# EAGLE board Adapter-IOX-test_array (EAGLE 7.7.0), part 1 of 2
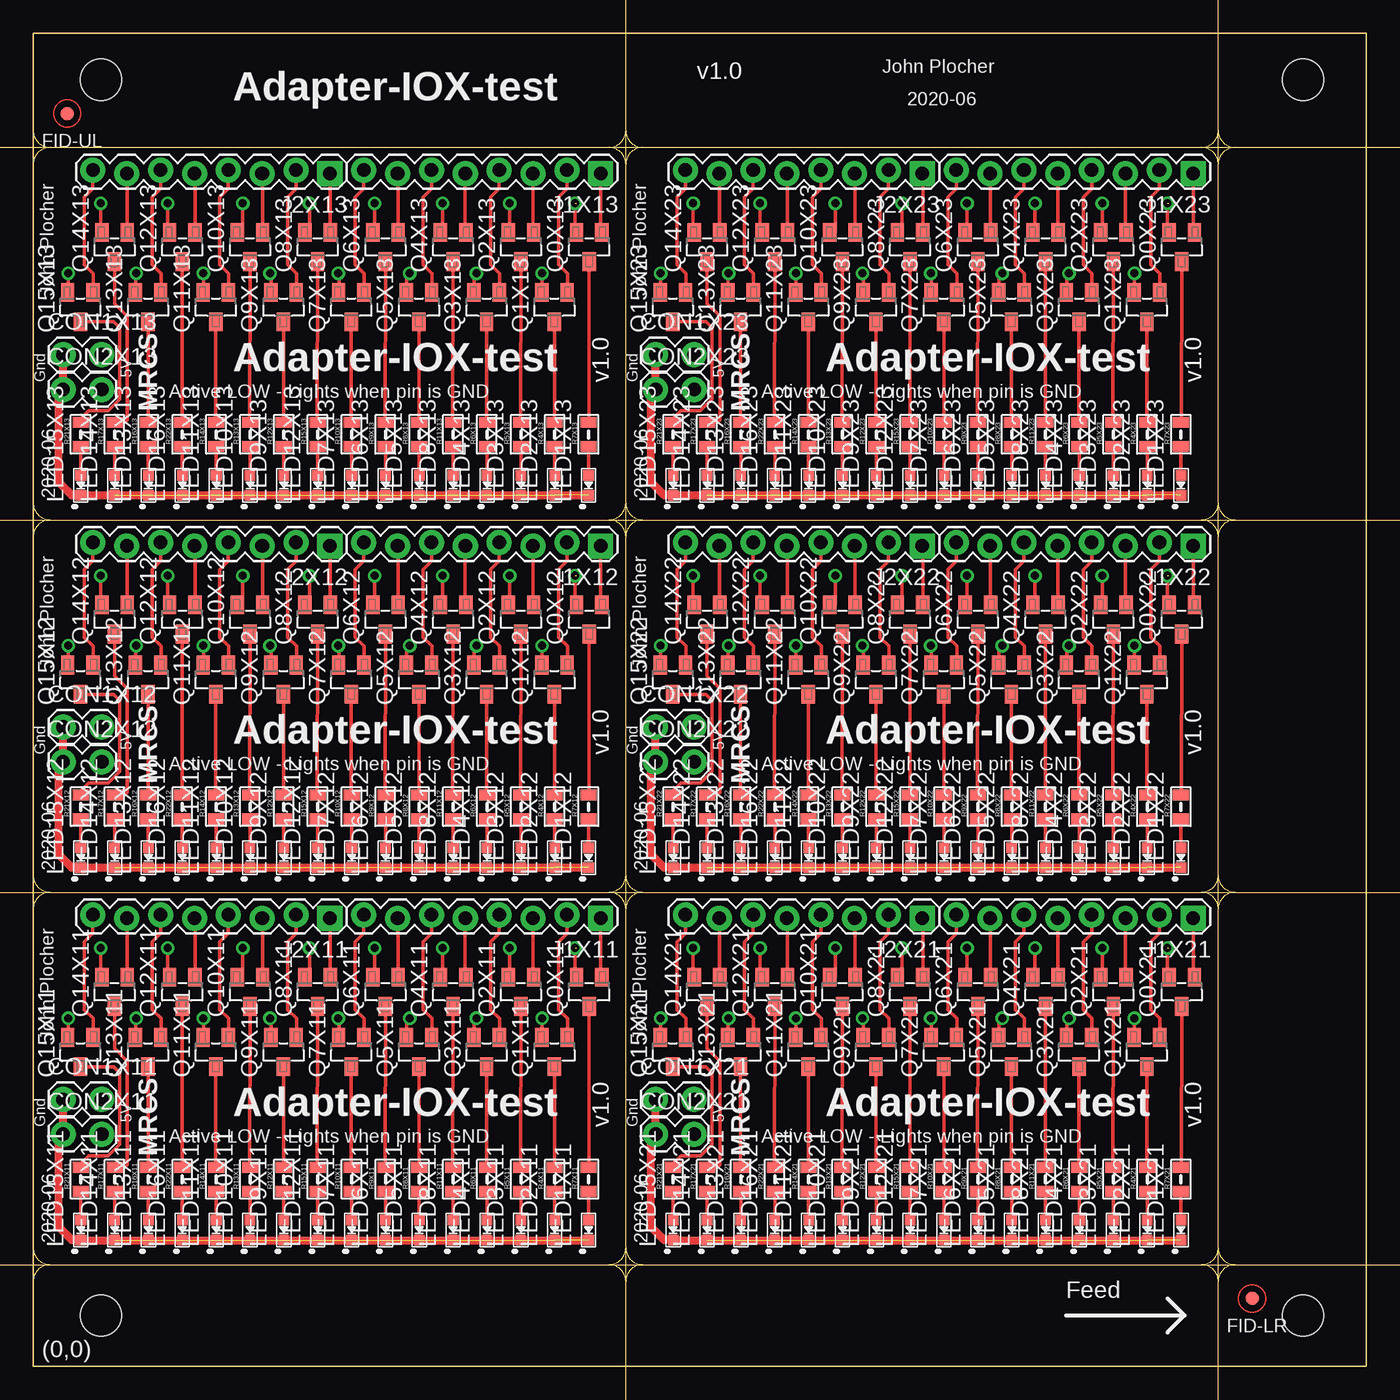
[diagram p0: board, top side]
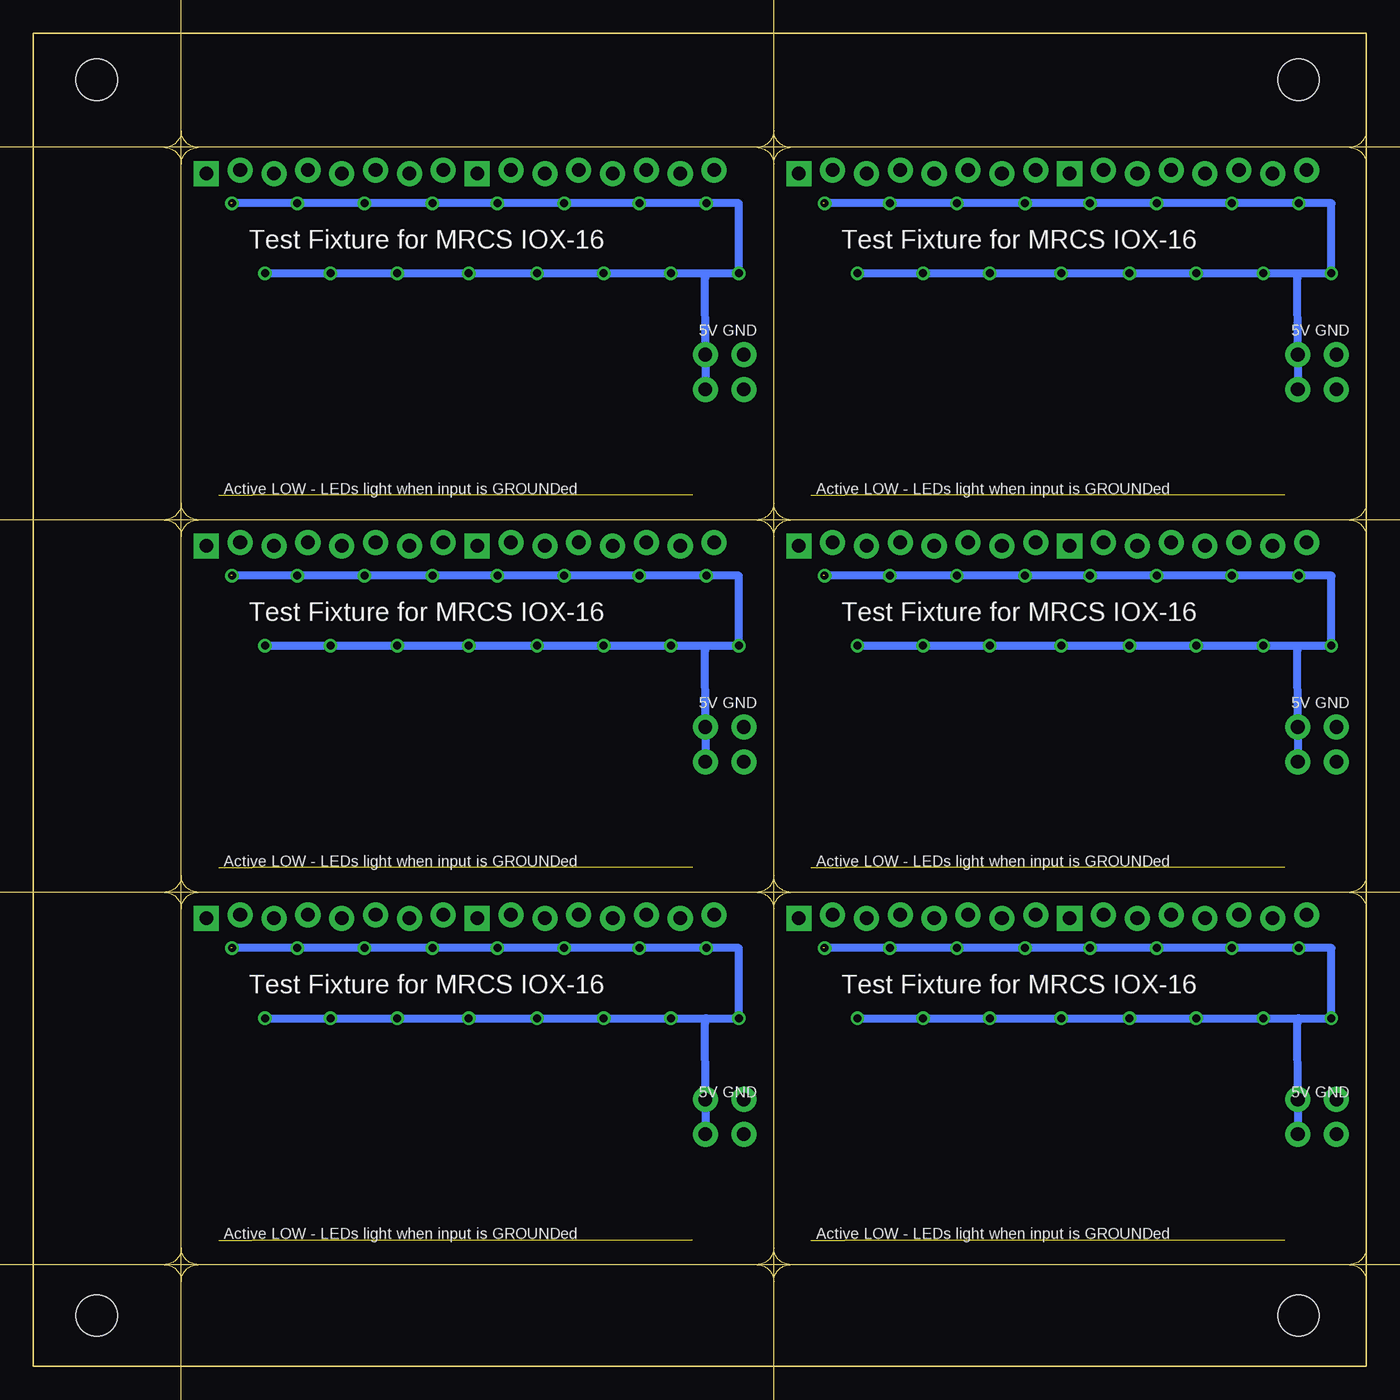
[diagram p1: board, bottom side, seen from below]

Size 100 x 100 mm. Coordinates in mm from the lower left corner, seen from the top.
Outline: 0,34.29 arc-90 1.27,35.56 arc-90 0,36.83
Outline: 0,8.89 arc90 1.27,7.62 arc90 0,6.35
Outline: 0,62.23 arc-90 1.27,63.5 arc-90 0,64.77
Outline: 0,90.17 arc-90 1.27,91.44 arc-90 0,92.71
Outline: 44.45,34.29 arc90 43.18,35.56 arc90 44.45,36.83 arc90 45.72,35.56 arc90 44.45,34.29
Outline: 43.18,7.62 arc90 44.45,8.89 arc90 45.72,7.62 arc90 44.45,6.35 arc90 43.18,7.62
Outline: 44.45,62.23 arc90 43.18,63.5 arc90 44.45,64.77 arc90 45.72,63.5 arc90 44.45,62.23
Outline: 44.45,90.17 arc90 43.18,91.44 arc90 44.45,92.71 arc90 45.72,91.44 arc90 44.45,90.17
Outline: 88.9,34.29 arc90 87.63,35.56 arc90 88.9,36.83 arc90 90.17,35.56 arc90 88.9,34.29
Outline: 87.63,7.62 arc90 88.9,8.89 arc90 90.17,7.62 arc90 88.9,6.35 arc90 87.63,7.62
Outline: 88.9,62.23 arc90 87.63,63.5 arc90 88.9,64.77 arc90 90.17,63.5 arc90 88.9,62.23
Outline: 88.9,90.17 arc90 87.63,91.44 arc90 88.9,92.71 arc90 90.17,91.44 arc90 88.9,90.17
Copper layers (1*16): Top 0.035mm / dielectric 1.5mm / Bottom 0.035mm
Design rules "default": minimum track width 10mil, minimum drill 0.6mm, track to track 8mil, track to pad 8mil, pad to pad 8mil, via to via 8mil, smd to smd 8mil, copper to edge 40mil, drill to drill 8mil, minimum pad ring 10mil, minimum via ring 8mil, stop-mask expansion 4mil, vias tented up to drill 0mil, thermal gap 10mil
Milling: 6 lines

## Footprints (pad centres in the part's own frame; a part is rotated, then mirrored left to right if it is on the bottom)
1X02_LOCK = drill 1.016 pad 1.88: 1 -0.178,0; 2 2.718,0
FIDUCIAL_1MM = smd 1 x 1: 1 0,0
1X08_LOCK = drill 1.016 pad 1.88 square: 1 0,0.127 | drill 1.016 pad 1.88: 2 2.54,-0.127; 3 5.08,0.127; 4 7.62,-0.127; 5 10.16,0.127; 6 12.7,-0.127; 7 15.24,0.127; 8 17.78,-0.127
0603-LED = smd 0.8 x 0.8: A 0.75,0; C -0.75,0
SOT23 = smd 1.4 x 1: 1 1.1,-0.95; 2 1.1,0.95; 3 -1.1,0
0805-RES = smd 0.8 x 1.2: 1 -0.9,0; 2 0.9,0
BOARD-10X10-TEMPLATE = hole 3.1: 5.08,96.52; 95.25,96.52; 5.08,3.81; 95.25,3.81

## Placement (x,y rotation side)
CON1X11  0.100  [1X02_LOCK]  2.41,20.02 0 top
CON1X12  0.100  [1X02_LOCK]  2.41,47.96 0 top
CON1X13  0.100  [1X02_LOCK]  2.41,75.9 0 top
CON1X21  0.100  [1X02_LOCK]  46.86,20.02 0 top
CON1X22  0.100  [1X02_LOCK]  46.86,47.96 0 top
CON1X23  0.100  [1X02_LOCK]  46.86,75.9 0 top
CON2X11  0.100  [1X02_LOCK]  2.41,17.4 0 top
CON2X12  0.100  [1X02_LOCK]  2.41,45.34 0 top
CON2X13  0.100  [1X02_LOCK]  2.41,73.28 0 top
CON2X21  0.100  [1X02_LOCK]  46.86,17.4 0 top
CON2X22  0.100  [1X02_LOCK]  46.86,45.34 0 top
CON2X23  0.100  [1X02_LOCK]  46.86,73.28 0 top
FID-LR  FIDUCIAL  [FIDUCIAL_1MM]  91.44,5.08 0 top
FID-UL  FIDUCIAL  [FIDUCIAL_1MM]  2.54,93.98 0 top
J1X11  0.100  [1X08_LOCK]  42.57,33.73 180 top
J1X12  0.100  [1X08_LOCK]  42.57,61.67 180 top
J1X13  0.100  [1X08_LOCK]  42.57,89.61 180 top
J1X21  0.100  [1X08_LOCK]  87.02,33.73 180 top
J1X22  0.100  [1X08_LOCK]  87.02,61.67 180 top
J1X23  0.100  [1X08_LOCK]  87.02,89.61 180 top
J2X11  0.100  [1X08_LOCK]  22.25,33.73 180 top
J2X12  0.100  [1X08_LOCK]  22.25,61.67 180 top
J2X13  0.100  [1X08_LOCK]  22.25,89.61 180 top
J2X21  0.100  [1X08_LOCK]  66.7,33.73 180 top
J2X22  0.100  [1X08_LOCK]  66.7,61.67 180 top
J2X23  0.100  [1X08_LOCK]  66.7,89.61 180 top
LED1X11  Y  [0603-LED]  41.66,10.21 90 top
LED1X12  Y  [0603-LED]  41.66,38.15 90 top
LED1X13  Y  [0603-LED]  41.66,66.09 90 top
LED1X21  Y  [0603-LED]  86.11,10.21 90 top
LED1X22  Y  [0603-LED]  86.11,38.15 90 top
LED1X23  Y  [0603-LED]  86.11,66.09 90 top
LED2X11  Y  [0603-LED]  39.12,10.21 90 top
LED2X12  Y  [0603-LED]  39.12,38.15 90 top
LED2X13  Y  [0603-LED]  39.12,66.09 90 top
LED2X21  Y  [0603-LED]  83.57,10.21 90 top
LED2X22  Y  [0603-LED]  83.57,38.15 90 top
LED2X23  Y  [0603-LED]  83.57,66.09 90 top
LED3X11  Y  [0603-LED]  36.58,10.21 90 top
LED3X12  Y  [0603-LED]  36.58,38.15 90 top
LED3X13  Y  [0603-LED]  36.58,66.09 90 top
LED3X21  Y  [0603-LED]  81.03,10.21 90 top
LED3X22  Y  [0603-LED]  81.03,38.15 90 top
LED3X23  Y  [0603-LED]  81.03,66.09 90 top
LED4X11  Y  [0603-LED]  34.04,10.21 90 top
LED4X12  Y  [0603-LED]  34.04,38.15 90 top
LED4X13  Y  [0603-LED]  34.04,66.09 90 top
LED4X21  Y  [0603-LED]  78.49,10.21 90 top
LED4X22  Y  [0603-LED]  78.49,38.15 90 top
LED4X23  Y  [0603-LED]  78.49,66.09 90 top
LED5X11  Y  [0603-LED]  28.96,10.21 90 top
LED5X12  Y  [0603-LED]  28.96,38.15 90 top
LED5X13  Y  [0603-LED]  28.96,66.09 90 top
LED5X21  Y  [0603-LED]  73.41,10.21 90 top
LED5X22  Y  [0603-LED]  73.41,38.15 90 top
LED5X23  Y  [0603-LED]  73.41,66.09 90 top
LED6X11  Y  [0603-LED]  26.42,10.21 90 top
LED6X12  Y  [0603-LED]  26.42,38.15 90 top
LED6X13  Y  [0603-LED]  26.42,66.09 90 top
LED6X21  Y  [0603-LED]  70.87,10.21 90 top
LED6X22  Y  [0603-LED]  70.87,38.15 90 top
LED6X23  Y  [0603-LED]  70.87,66.09 90 top
LED7X11  Y  [0603-LED]  23.88,10.21 90 top
LED7X12  Y  [0603-LED]  23.88,38.15 90 top
LED7X13  Y  [0603-LED]  23.88,66.09 90 top
LED7X21  Y  [0603-LED]  68.33,10.21 90 top
LED7X22  Y  [0603-LED]  68.33,38.15 90 top
LED7X23  Y  [0603-LED]  68.33,66.09 90 top
LED8X11  Y  [0603-LED]  31.5,10.21 90 top
LED8X12  Y  [0603-LED]  31.5,38.15 90 top
LED8X13  Y  [0603-LED]  31.5,66.09 90 top
LED8X21  Y  [0603-LED]  75.95,10.21 90 top
LED8X22  Y  [0603-LED]  75.95,38.15 90 top
LED8X23  Y  [0603-LED]  75.95,66.09 90 top
LED9X11  Y  [0603-LED]  18.8,10.21 90 top
LED9X12  Y  [0603-LED]  18.8,38.15 90 top
LED9X13  Y  [0603-LED]  18.8,66.09 90 top
LED9X21  Y  [0603-LED]  63.25,10.21 90 top
LED9X22  Y  [0603-LED]  63.25,38.15 90 top
LED9X23  Y  [0603-LED]  63.25,66.09 90 top
LED10X11  Y  [0603-LED]  16.26,10.21 90 top
LED10X12  Y  [0603-LED]  16.26,38.15 90 top
LED10X13  Y  [0603-LED]  16.26,66.09 90 top
LED10X21  Y  [0603-LED]  60.71,10.21 90 top
LED10X22  Y  [0603-LED]  60.71,38.15 90 top
LED10X23  Y  [0603-LED]  60.71,66.09 90 top
LED11X11  Y  [0603-LED]  13.72,10.21 90 top
LED11X12  Y  [0603-LED]  13.72,38.15 90 top
LED11X13  Y  [0603-LED]  13.72,66.09 90 top
LED11X21  Y  [0603-LED]  58.17,10.21 90 top
LED11X22  Y  [0603-LED]  58.17,38.15 90 top
LED11X23  Y  [0603-LED]  58.17,66.09 90 top
LED12X11  Y  [0603-LED]  21.34,10.21 90 top
LED12X12  Y  [0603-LED]  21.34,38.15 90 top
LED12X13  Y  [0603-LED]  21.34,66.09 90 top
LED12X21  Y  [0603-LED]  65.79,10.21 90 top
LED12X22  Y  [0603-LED]  65.79,38.15 90 top
LED12X23  Y  [0603-LED]  65.79,66.09 90 top
LED13X11  Y  [0603-LED]  8.64,10.21 90 top
LED13X12  Y  [0603-LED]  8.64,38.15 90 top
LED13X13  Y  [0603-LED]  8.64,66.09 90 top
LED13X21  Y  [0603-LED]  53.09,10.21 90 top
LED13X22  Y  [0603-LED]  53.09,38.15 90 top
LED13X23  Y  [0603-LED]  53.09,66.09 90 top
LED14X11  Y  [0603-LED]  6.1,10.21 90 top
LED14X12  Y  [0603-LED]  6.1,38.15 90 top
LED14X13  Y  [0603-LED]  6.1,66.09 90 top
LED14X21  Y  [0603-LED]  50.55,10.21 90 top
LED14X22  Y  [0603-LED]  50.55,38.15 90 top
LED14X23  Y  [0603-LED]  50.55,66.09 90 top
LED15X11  Y  [0603-LED]  3.56,10.21 90 top
LED15X12  Y  [0603-LED]  3.56,38.15 90 top
LED15X13  Y  [0603-LED]  3.56,66.09 90 top
LED15X21  Y  [0603-LED]  48.01,10.21 90 top
LED15X22  Y  [0603-LED]  48.01,38.15 90 top
LED15X23  Y  [0603-LED]  48.01,66.09 90 top
LED16X11  Y  [0603-LED]  11.18,10.21 90 top
LED16X12  Y  [0603-LED]  11.18,38.15 90 top
LED16X13  Y  [0603-LED]  11.18,66.09 90 top
LED16X21  Y  [0603-LED]  55.63,10.21 90 top
LED16X22  Y  [0603-LED]  55.63,38.15 90 top
LED16X23  Y  [0603-LED]  55.63,66.09 90 top
Q0X11  P-FET  [SOT23]  41.71,28.09 90 top
Q0X12  P-FET  [SOT23]  41.71,56.03 90 top
Q0X13  P-FET  [SOT23]  41.71,83.97 90 top
Q0X21  P-FET  [SOT23]  86.16,28.09 90 top
Q0X22  P-FET  [SOT23]  86.16,56.03 90 top
Q0X23  P-FET  [SOT23]  86.16,83.97 90 top
Q1X11  P-FET  [SOT23]  39.09,23.57 90 top
Q1X12  P-FET  [SOT23]  39.09,51.51 90 top
Q1X13  P-FET  [SOT23]  39.09,79.45 90 top
Q1X21  P-FET  [SOT23]  83.54,23.57 90 top
Q1X22  P-FET  [SOT23]  83.54,51.51 90 top
Q1X23  P-FET  [SOT23]  83.54,79.45 90 top
Q2X11  P-FET  [SOT23]  36.58,28.09 90 top
Q2X12  P-FET  [SOT23]  36.58,56.03 90 top
Q2X13  P-FET  [SOT23]  36.58,83.97 90 top
Q2X21  P-FET  [SOT23]  81.03,28.09 90 top
Q2X22  P-FET  [SOT23]  81.03,56.03 90 top
Q2X23  P-FET  [SOT23]  81.03,83.97 90 top
Q3X11  P-FET  [SOT23]  34.01,23.57 90 top
Q3X12  P-FET  [SOT23]  34.01,51.51 90 top
Q3X13  P-FET  [SOT23]  34.01,79.45 90 top
Q3X21  P-FET  [SOT23]  78.46,23.57 90 top
Q3X22  P-FET  [SOT23]  78.46,51.51 90 top
Q3X23  P-FET  [SOT23]  78.46,79.45 90 top
Q4X11  P-FET  [SOT23]  31.5,28.09 90 top
Q4X12  P-FET  [SOT23]  31.5,56.03 90 top
Q4X13  P-FET  [SOT23]  31.5,83.97 90 top
Q4X21  P-FET  [SOT23]  75.95,28.09 90 top
Q4X22  P-FET  [SOT23]  75.95,56.03 90 top
Q4X23  P-FET  [SOT23]  75.95,83.97 90 top
Q5X11  P-FET  [SOT23]  28.93,23.57 90 top
Q5X12  P-FET  [SOT23]  28.93,51.51 90 top
Q5X13  P-FET  [SOT23]  28.93,79.45 90 top
Q5X21  P-FET  [SOT23]  73.38,23.57 90 top
Q5X22  P-FET  [SOT23]  73.38,51.51 90 top
Q5X23  P-FET  [SOT23]  73.38,79.45 90 top
Q6X11  P-FET  [SOT23]  26.42,28.09 90 top
Q6X12  P-FET  [SOT23]  26.42,56.03 90 top
Q6X13  P-FET  [SOT23]  26.42,83.97 90 top
Q6X21  P-FET  [SOT23]  70.87,28.09 90 top
Q6X22  P-FET  [SOT23]  70.87,56.03 90 top
Q6X23  P-FET  [SOT23]  70.87,83.97 90 top
Q7X11  P-FET  [SOT23]  23.85,23.57 90 top
Q7X12  P-FET  [SOT23]  23.85,51.51 90 top
Q7X13  P-FET  [SOT23]  23.85,79.45 90 top
Q7X21  P-FET  [SOT23]  68.3,23.57 90 top
Q7X22  P-FET  [SOT23]  68.3,51.51 90 top
Q7X23  P-FET  [SOT23]  68.3,79.45 90 top
Q8X11  P-FET  [SOT23]  21.34,28.09 90 top
Q8X12  P-FET  [SOT23]  21.34,56.03 90 top
Q8X13  P-FET  [SOT23]  21.34,83.97 90 top
Q8X21  P-FET  [SOT23]  65.79,28.09 90 top
Q8X22  P-FET  [SOT23]  65.79,56.03 90 top
Q8X23  P-FET  [SOT23]  65.79,83.97 90 top
Q9X11  P-FET  [SOT23]  18.77,23.57 90 top
Q9X12  P-FET  [SOT23]  18.77,51.51 90 top
Q9X13  P-FET  [SOT23]  18.77,79.45 90 top
Q9X21  P-FET  [SOT23]  63.22,23.57 90 top
Q9X22  P-FET  [SOT23]  63.22,51.51 90 top
Q9X23  P-FET  [SOT23]  63.22,79.45 90 top
Q10X11  P-FET  [SOT23]  16.26,28.09 90 top
Q10X12  P-FET  [SOT23]  16.26,56.03 90 top
Q10X13  P-FET  [SOT23]  16.26,83.97 90 top
Q10X21  P-FET  [SOT23]  60.71,28.09 90 top
Q10X22  P-FET  [SOT23]  60.71,56.03 90 top
Q10X23  P-FET  [SOT23]  60.71,83.97 90 top
Q11X11  P-FET  [SOT23]  13.69,23.57 90 top
Q11X12  P-FET  [SOT23]  13.69,51.51 90 top
Q11X13  P-FET  [SOT23]  13.69,79.45 90 top
Q11X21  P-FET  [SOT23]  58.14,23.57 90 top
Q11X22  P-FET  [SOT23]  58.14,51.51 90 top
Q11X23  P-FET  [SOT23]  58.14,79.45 90 top
Q12X11  P-FET  [SOT23]  11.18,28.09 90 top
Q12X12  P-FET  [SOT23]  11.18,56.03 90 top
Q12X13  P-FET  [SOT23]  11.18,83.97 90 top
Q12X21  P-FET  [SOT23]  55.63,28.09 90 top
Q12X22  P-FET  [SOT23]  55.63,56.03 90 top
Q12X23  P-FET  [SOT23]  55.63,83.97 90 top
Q13X11  P-FET  [SOT23]  8.61,23.57 90 top
Q13X12  P-FET  [SOT23]  8.61,51.51 90 top
Q13X13  P-FET  [SOT23]  8.61,79.45 90 top
Q13X21  P-FET  [SOT23]  53.06,23.57 90 top
Q13X22  P-FET  [SOT23]  53.06,51.51 90 top
Q13X23  P-FET  [SOT23]  53.06,79.45 90 top
Q14X11  P-FET  [SOT23]  6.1,28.09 90 top
Q14X12  P-FET  [SOT23]  6.1,56.03 90 top
Q14X13  P-FET  [SOT23]  6.1,83.97 90 top
Q14X21  P-FET  [SOT23]  50.55,28.09 90 top
Q14X22  P-FET  [SOT23]  50.55,56.03 90 top
Q14X23  P-FET  [SOT23]  50.55,83.97 90 top
Q15X11  P-FET  [SOT23]  3.53,23.57 90 top
Q15X12  P-FET  [SOT23]  3.53,51.51 90 top
Q15X13  P-FET  [SOT23]  3.53,79.45 90 top
Q15X21  P-FET  [SOT23]  47.98,23.57 90 top
Q15X22  P-FET  [SOT23]  47.98,51.51 90 top
Q15X23  P-FET  [SOT23]  47.98,79.45 90 top
R4X11  2K0  [0805-RES]  39.12,14.02 90 top
R4X12  2K0  [0805-RES]  39.12,41.96 90 top
R4X13  2K0  [0805-RES]  39.12,69.9 90 top
R4X21  2K0  [0805-RES]  83.57,14.02 90 top
R4X22  2K0  [0805-RES]  83.57,41.96 90 top
R4X23  2K0  [0805-RES]  83.57,69.9 90 top
R5X11  2K0  [0805-RES]  36.58,14.02 90 top
R5X12  2K0  [0805-RES]  36.58,41.96 90 top
R5X13  2K0  [0805-RES]  36.58,69.9 90 top
R5X21  2K0  [0805-RES]  81.03,14.02 90 top
R5X22  2K0  [0805-RES]  81.03,41.96 90 top
R5X23  2K0  [0805-RES]  81.03,69.9 90 top
R6X11  2K0  [0805-RES]  34.04,14.02 90 top
R6X12  2K0  [0805-RES]  34.04,41.96 90 top
R6X13  2K0  [0805-RES]  34.04,69.9 90 top
R6X21  2K0  [0805-RES]  78.49,14.02 90 top
R6X22  2K0  [0805-RES]  78.49,41.96 90 top
R6X23  2K0  [0805-RES]  78.49,69.9 90 top
R7X11  2K0  [0805-RES]  41.66,14.02 90 top
R7X12  2K0  [0805-RES]  41.66,41.96 90 top
R7X13  2K0  [0805-RES]  41.66,69.9 90 top
R7X21  2K0  [0805-RES]  86.11,14.02 90 top
R7X22  2K0  [0805-RES]  86.11,41.96 90 top
R7X23  2K0  [0805-RES]  86.11,69.9 90 top
R8X11  2K0  [0805-RES]  28.96,14.02 90 top
R8X12  2K0  [0805-RES]  28.96,41.96 90 top
R8X13  2K0  [0805-RES]  28.96,69.9 90 top
R8X21  2K0  [0805-RES]  73.41,14.02 90 top
R8X22  2K0  [0805-RES]  73.41,41.96 90 top
R8X23  2K0  [0805-RES]  73.41,69.9 90 top
R9X11  2K0  [0805-RES]  26.42,14.02 90 top
R9X12  2K0  [0805-RES]  26.42,41.96 90 top
R9X13  2K0  [0805-RES]  26.42,69.9 90 top
R9X21  2K0  [0805-RES]  70.87,14.02 90 top
R9X22  2K0  [0805-RES]  70.87,41.96 90 top
R9X23  2K0  [0805-RES]  70.87,69.9 90 top
R10X11  2K0  [0805-RES]  23.88,14.02 90 top
R10X12  2K0  [0805-RES]  23.88,41.96 90 top
R10X13  2K0  [0805-RES]  23.88,69.9 90 top
R10X21  2K0  [0805-RES]  68.33,14.02 90 top
R10X22  2K0  [0805-RES]  68.33,41.96 90 top
R10X23  2K0  [0805-RES]  68.33,69.9 90 top
R11X11  2K0  [0805-RES]  31.5,14.02 90 top
R11X12  2K0  [0805-RES]  31.5,41.96 90 top
R11X13  2K0  [0805-RES]  31.5,69.9 90 top
R11X21  2K0  [0805-RES]  75.95,14.02 90 top
R11X22  2K0  [0805-RES]  75.95,41.96 90 top
R11X23  2K0  [0805-RES]  75.95,69.9 90 top
R12X11  2K0  [0805-RES]  18.8,14.02 90 top
R12X12  2K0  [0805-RES]  18.8,41.96 90 top
R12X13  2K0  [0805-RES]  18.8,69.9 90 top
R12X21  2K0  [0805-RES]  63.25,14.02 90 top
R12X22  2K0  [0805-RES]  63.25,41.96 90 top
R12X23  2K0  [0805-RES]  63.25,69.9 90 top
R13X11  2K0  [0805-RES]  16.26,14.02 90 top
R13X12  2K0  [0805-RES]  16.26,41.96 90 top
R13X13  2K0  [0805-RES]  16.26,69.9 90 top
R13X21  2K0  [0805-RES]  60.71,14.02 90 top
R13X22  2K0  [0805-RES]  60.71,41.96 90 top
R13X23  2K0  [0805-RES]  60.71,69.9 90 top
R14X11  2K0  [0805-RES]  13.72,14.02 90 top
R14X12  2K0  [0805-RES]  13.72,41.96 90 top
R14X13  2K0  [0805-RES]  13.72,69.9 90 top
R14X21  2K0  [0805-RES]  58.17,14.02 90 top
R14X22  2K0  [0805-RES]  58.17,41.96 90 top
R14X23  2K0  [0805-RES]  58.17,69.9 90 top
R15X11  2K0  [0805-RES]  21.34,14.02 90 top
R15X12  2K0  [0805-RES]  21.34,41.96 90 top
R15X13  2K0  [0805-RES]  21.34,69.9 90 top
R15X21  2K0  [0805-RES]  65.79,14.02 90 top
R15X22  2K0  [0805-RES]  65.79,41.96 90 top
R15X23  2K0  [0805-RES]  65.79,69.9 90 top
R16X11  2K0  [0805-RES]  8.64,14.02 90 top
R16X12  2K0  [0805-RES]  8.64,41.96 90 top
R16X13  2K0  [0805-RES]  8.64,69.9 90 top
R16X21  2K0  [0805-RES]  53.09,14.02 90 top
R16X22  2K0  [0805-RES]  53.09,41.96 90 top
R16X23  2K0  [0805-RES]  53.09,69.9 90 top
R17X11  2K0  [0805-RES]  6.1,14.02 90 top
R17X12  2K0  [0805-RES]  6.1,41.96 90 top
R17X13  2K0  [0805-RES]  6.1,69.9 90 top
R17X21  2K0  [0805-RES]  50.55,14.02 90 top
R17X22  2K0  [0805-RES]  50.55,41.96 90 top
R17X23  2K0  [0805-RES]  50.55,69.9 90 top
R21X11  2K0  [0805-RES]  3.56,14.02 90 top
R21X12  2K0  [0805-RES]  3.56,41.96 90 top
R21X13  2K0  [0805-RES]  3.56,69.9 90 top
R21X21  2K0  [0805-RES]  48.01,14.02 90 top
R21X22  2K0  [0805-RES]  48.01,41.96 90 top
R21X23  2K0  [0805-RES]  48.01,69.9 90 top
R22X1  BOARD  [BOARD-10X10-TEMPLATE]  0,0 0 top
R22X11  2K0  [0805-RES]  11.18,14.02 90 top
R22X12  2K0  [0805-RES]  11.18,41.96 90 top
R22X13  2K0  [0805-RES]  11.18,69.9 90 top
R22X21  2K0  [0805-RES]  55.63,14.02 90 top
R22X22  2K0  [0805-RES]  55.63,41.96 90 top
R22X23  2K0  [0805-RES]  55.63,69.9 90 top

## Library data of the parts
CON1X11-CON1X13 CON1X21-CON1X23 CON2X11-CON2X13 CON2X21-CON2X23 FID-LR FID-UL J1X11-J1X13 J1X21-J1X23 J2X11-J2X13 J2X21-J2X23 LED1X11-LED1X13 LED1X21-LED1X23 LED2X11-LED2X13 LED2X21-LED2X23 LED3X11-LED3X13 LED3X21-LED3X23 LED4X11-LED4X13 LED4X21-LED4X23 LED5X11-LED5X13 LED5X21-LED5X23 LED6X11-LED6X13 LED6X21-LED6X23 LED7X11-LED7X13 LED7X21-LED7X23 LED8X11-LED8X13 LED8X21-LED8X23 LED9X11-LED9X13 LED9X21-LED9X23 LED10X11-LED10X13 LED10X21-LED10X23 LED11X11-LED11X13 LED11X21-LED11X23 LED12X11-LED12X13 LED12X21-LED12X23 LED13X11-LED13X13 LED13X21-LED13X23 LED14X11-LED14X13 LED14X21-LED14X23 LED15X11-LED15X13 LED15X21-LED15X23 LED16X11-LED16X13 LED16X21-LED16X23 Q0X11-Q0X13 Q0X21-Q0X23 Q1X11-Q1X13 Q1X21-Q1X23 Q2X11-Q2X13 Q2X21-Q2X23 Q3X11-Q3X13 Q3X21-Q3X23 Q4X11-Q4X13 Q4X21-Q4X23 Q5X11-Q5X13 Q5X21-Q5X23 Q6X11-Q6X13 Q6X21-Q6X23 Q7X11-Q7X13 Q7X21-Q7X23 Q8X11-Q8X13 Q8X21-Q8X23 Q9X11-Q9X13 Q9X21-Q9X23 Q10X11-Q10X13 Q10X21-Q10X23 Q11X11-Q11X13 Q11X21-Q11X23 Q12X11-Q12X13 Q12X21-Q12X23 Q13X11-Q13X13 Q13X21-Q13X23 Q14X11-Q14X13 Q14X21-Q14X23 Q15X11-Q15X13 Q15X21-Q15X23 R4X11-R4X13 R4X21-R4X23 R5X11-R5X13 R5X21-R5X23 R6X11-R6X13 R6X21-R6X23 R7X11-R7X13 R7X21-R7X23 R8X11-R8X13 R8X21-R8X23 R9X11-R9X13 R9X21-R9X23 R10X11-R10X13 R10X21-R10X23 R11X11-R11X13 R11X21-R11X23 R12X11-R12X13 R12X21-R12X23 R13X11-R13X13 R13X21-R13X23 R14X11-R14X13 R14X21-R14X23 R15X11-R15X13 R15X21-R15X23 R16X11-R16X13 R16X21-R16X23 R17X11-R17X13 R17X21-R17X23 R21X11-R21X13 R21X21-R21X23 R22X1 R22X11-R22X13 R22X21-R22X23 = SPCoast

## Nets
GNDX11: CON1X11.1 CON2X11.1 LED1X11.C LED2X11.C LED3X11.C LED4X11.C LED5X11.C LED6X11.C LED7X11.C LED8X11.C LED9X11.C LED10X11.C LED11X11.C LED12X11.C LED13X11.C LED14X11.C LED15X11.C LED16X11.C
GNDX12: CON1X12.1 CON2X12.1 LED1X12.C LED2X12.C LED3X12.C LED4X12.C LED5X12.C LED6X12.C LED7X12.C LED8X12.C LED9X12.C LED10X12.C LED11X12.C LED12X12.C LED13X12.C LED14X12.C LED15X12.C LED16X12.C
GNDX13: CON1X13.1 CON2X13.1 LED1X13.C LED2X13.C LED3X13.C LED4X13.C LED5X13.C LED6X13.C LED7X13.C LED8X13.C LED9X13.C LED10X13.C LED11X13.C LED12X13.C LED13X13.C LED14X13.C LED15X13.C LED16X13.C
GNDX21: CON1X21.1 CON2X21.1 LED1X21.C LED2X21.C LED3X21.C LED4X21.C LED5X21.C LED6X21.C LED7X21.C LED8X21.C LED9X21.C LED10X21.C LED11X21.C LED12X21.C LED13X21.C LED14X21.C LED15X21.C LED16X21.C
GNDX22: CON1X22.1 CON2X22.1 LED1X22.C LED2X22.C LED3X22.C LED4X22.C LED5X22.C LED6X22.C LED7X22.C LED8X22.C LED9X22.C LED10X22.C LED11X22.C LED12X22.C LED13X22.C LED14X22.C LED15X22.C LED16X22.C
GNDX23: CON1X23.1 CON2X23.1 LED1X23.C LED2X23.C LED3X23.C LED4X23.C LED5X23.C LED6X23.C LED7X23.C LED8X23.C LED9X23.C LED10X23.C LED11X23.C LED12X23.C LED13X23.C LED14X23.C LED15X23.C LED16X23.C
N$1X11: Q4X11.3 R11X11.2
N$1X12: Q4X12.3 R11X12.2
N$1X13: Q4X13.3 R11X13.2
N$1X21: Q4X21.3 R11X21.2
N$1X22: Q4X22.3 R11X22.2
N$1X23: Q4X23.3 R11X23.2
N$3X11: Q5X11.3 R8X11.2
N$3X12: Q5X12.3 R8X12.2
N$3X13: Q5X13.3 R8X13.2
N$3X21: Q5X21.3 R8X21.2
N$3X22: Q5X22.3 R8X22.2
N$3X23: Q5X23.3 R8X23.2
N$4X11: Q6X11.3 R9X11.2
N$4X12: Q6X12.3 R9X12.2
N$4X13: Q6X13.3 R9X13.2
N$4X21: Q6X21.3 R9X21.2
N$4X22: Q6X22.3 R9X22.2
N$4X23: Q6X23.3 R9X23.2
N$5X11: Q7X11.3 R10X11.2
N$5X12: Q7X12.3 R10X12.2
N$5X13: Q7X13.3 R10X13.2
N$5X21: Q7X21.3 R10X21.2
N$5X22: Q7X22.3 R10X22.2
N$5X23: Q7X23.3 R10X23.2
N$6X11: LED8X11.A R11X11.1
N$6X12: LED8X12.A R11X12.1
N$6X13: LED8X13.A R11X13.1
N$6X21: LED8X21.A R11X21.1
N$6X22: LED8X22.A R11X22.1
N$6X23: LED8X23.A R11X23.1
N$7X11: LED5X11.A R8X11.1
N$7X12: LED5X12.A R8X12.1
N$7X13: LED5X13.A R8X13.1
N$7X21: LED5X21.A R8X21.1
N$7X22: LED5X22.A R8X22.1
N$7X23: LED5X23.A R8X23.1
N$8X11: LED6X11.A R9X11.1
N$8X12: LED6X12.A R9X12.1
N$8X13: LED6X13.A R9X13.1
N$8X21: LED6X21.A R9X21.1
N$8X22: LED6X22.A R9X22.1
N$8X23: LED6X23.A R9X23.1
N$9X11: LED7X11.A R10X11.1
N$9X12: LED7X12.A R10X12.1
N$9X13: LED7X13.A R10X13.1
N$9X21: LED7X21.A R10X21.1
N$9X22: LED7X22.A R10X22.1
N$9X23: LED7X23.A R10X23.1
N$10X11: Q8X11.3 R15X11.2
N$10X12: Q8X12.3 R15X12.2
N$10X13: Q8X13.3 R15X13.2
N$10X21: Q8X21.3 R15X21.2
N$10X22: Q8X22.3 R15X22.2
N$10X23: Q8X23.3 R15X23.2
N$11X11: Q9X11.3 R12X11.2
N$11X12: Q9X12.3 R12X12.2
N$11X13: Q9X13.3 R12X13.2
N$11X21: Q9X21.3 R12X21.2
N$11X22: Q9X22.3 R12X22.2
N$11X23: Q9X23.3 R12X23.2
N$12X11: Q10X11.3 R13X11.2
N$12X12: Q10X12.3 R13X12.2
N$12X13: Q10X13.3 R13X13.2
N$12X21: Q10X21.3 R13X21.2
N$12X22: Q10X22.3 R13X22.2
N$12X23: Q10X23.3 R13X23.2
N$13X11: Q11X11.3 R14X11.2
N$13X12: Q11X12.3 R14X12.2
N$13X13: Q11X13.3 R14X13.2
N$13X21: Q11X21.3 R14X21.2
N$13X22: Q11X22.3 R14X22.2
N$13X23: Q11X23.3 R14X23.2
N$14X11: LED12X11.A R15X11.1
N$14X12: LED12X12.A R15X12.1
N$14X13: LED12X13.A R15X13.1
N$14X21: LED12X21.A R15X21.1
N$14X22: LED12X22.A R15X22.1
N$14X23: LED12X23.A R15X23.1
N$15X11: LED9X11.A R12X11.1
N$15X12: LED9X12.A R12X12.1
N$15X13: LED9X13.A R12X13.1
N$15X21: LED9X21.A R12X21.1
N$15X22: LED9X22.A R12X22.1
N$15X23: LED9X23.A R12X23.1
N$23X11: LED10X11.A R13X11.1
N$23X12: LED10X12.A R13X12.1
N$23X13: LED10X13.A R13X13.1
N$23X21: LED10X21.A R13X21.1
N$23X22: LED10X22.A R13X22.1
N$23X23: LED10X23.A R13X23.1
N$24X11: LED11X11.A R14X11.1
N$24X12: LED11X12.A R14X12.1
N$24X13: LED11X13.A R14X13.1
N$24X21: LED11X21.A R14X21.1
N$24X22: LED11X22.A R14X22.1
N$24X23: LED11X23.A R14X23.1
N$28X11: Q12X11.3 R22X11.2
N$28X12: Q12X12.3 R22X12.2
N$28X13: Q12X13.3 R22X13.2
N$28X21: Q12X21.3 R22X21.2
N$28X22: Q12X22.3 R22X22.2
N$28X23: Q12X23.3 R22X23.2
N$29X11: Q13X11.3 R16X11.2
N$29X12: Q13X12.3 R16X12.2
N$29X13: Q13X13.3 R16X13.2
N$29X21: Q13X21.3 R16X21.2
N$29X22: Q13X22.3 R16X22.2
N$29X23: Q13X23.3 R16X23.2
N$30X11: Q14X11.3 R17X11.2
N$30X12: Q14X12.3 R17X12.2
N$30X13: Q14X13.3 R17X13.2
N$30X21: Q14X21.3 R17X21.2
N$30X22: Q14X22.3 R17X22.2
N$30X23: Q14X23.3 R17X23.2
N$31X11: Q15X11.3 R21X11.2
N$31X12: Q15X12.3 R21X12.2
N$31X13: Q15X13.3 R21X13.2
N$31X21: Q15X21.3 R21X21.2
N$31X22: Q15X22.3 R21X22.2
N$31X23: Q15X23.3 R21X23.2
N$32X11: LED16X11.A R22X11.1
N$32X12: LED16X12.A R22X12.1
N$32X13: LED16X13.A R22X13.1
N$32X21: LED16X21.A R22X21.1
N$32X22: LED16X22.A R22X22.1
N$32X23: LED16X23.A R22X23.1
N$33X11: LED13X11.A R16X11.1
N$33X12: LED13X12.A R16X12.1
N$33X13: LED13X13.A R16X13.1
N$33X21: LED13X21.A R16X21.1
N$33X22: LED13X22.A R16X22.1
N$33X23: LED13X23.A R16X23.1
N$34X11: LED14X11.A R17X11.1
N$34X12: LED14X12.A R17X12.1
N$34X13: LED14X13.A R17X13.1
N$34X21: LED14X21.A R17X21.1
N$34X22: LED14X22.A R17X22.1
N$34X23: LED14X23.A R17X23.1
N$35X11: LED15X11.A R21X11.1
N$35X12: LED15X12.A R21X12.1
N$35X13: LED15X13.A R21X13.1
N$35X21: LED15X21.A R21X21.1
N$35X22: LED15X22.A R21X22.1
N$35X23: LED15X23.A R21X23.1
N$44X11: Q0X11.3 R7X11.2
N$44X12: Q0X12.3 R7X12.2
N$44X13: Q0X13.3 R7X13.2
N$44X21: Q0X21.3 R7X21.2
N$44X22: Q0X22.3 R7X22.2
N$44X23: Q0X23.3 R7X23.2
N$45X11: Q1X11.3 R4X11.2
N$45X12: Q1X12.3 R4X12.2
N$45X13: Q1X13.3 R4X13.2
N$45X21: Q1X21.3 R4X21.2
N$45X22: Q1X22.3 R4X22.2
N$45X23: Q1X23.3 R4X23.2
N$46X11: Q2X11.3 R5X11.2
N$46X12: Q2X12.3 R5X12.2
N$46X13: Q2X13.3 R5X13.2
N$46X21: Q2X21.3 R5X21.2
N$46X22: Q2X22.3 R5X22.2
N$46X23: Q2X23.3 R5X23.2
N$47X11: Q3X11.3 R6X11.2
N$47X12: Q3X12.3 R6X12.2
N$47X13: Q3X13.3 R6X13.2
N$47X21: Q3X21.3 R6X21.2
N$47X22: Q3X22.3 R6X22.2
N$47X23: Q3X23.3 R6X23.2
N$48X11: LED1X11.A R7X11.1
N$48X12: LED1X12.A R7X12.1
N$48X13: LED1X13.A R7X13.1
N$48X21: LED1X21.A R7X21.1
N$48X22: LED1X22.A R7X22.1
N$48X23: LED1X23.A R7X23.1
N$49X11: LED2X11.A R4X11.1
N$49X12: LED2X12.A R4X12.1
N$49X13: LED2X13.A R4X13.1
N$49X21: LED2X21.A R4X21.1
N$49X22: LED2X22.A R4X22.1
N$49X23: LED2X23.A R4X23.1
N$50X11: LED3X11.A R5X11.1
N$50X12: LED3X12.A R5X12.1
N$50X13: LED3X13.A R5X13.1
N$50X21: LED3X21.A R5X21.1
N$50X22: LED3X22.A R5X22.1
N$50X23: LED3X23.A R5X23.1
N$51X11: LED4X11.A R6X11.1
N$51X12: LED4X12.A R6X12.1
N$51X13: LED4X13.A R6X13.1
N$51X21: LED4X21.A R6X21.1
N$51X22: LED4X22.A R6X22.1
N$51X23: LED4X23.A R6X23.1
P1X11: J1X11.1 Q0X11.1
P1X12: J1X12.1 Q0X12.1
P1X13: J1X13.1 Q0X13.1
P1X21: J1X21.1 Q0X21.1
P1X22: J1X22.1 Q0X22.1
P1X23: J1X23.1 Q0X23.1
P2X11: J1X11.2 Q1X11.1
P2X12: J1X12.2 Q1X12.1
P2X13: J1X13.2 Q1X13.1
P2X21: J1X21.2 Q1X21.1
P2X22: J1X22.2 Q1X22.1
P2X23: J1X23.2 Q1X23.1
P3X11: J1X11.3 Q2X11.1
P3X12: J1X12.3 Q2X12.1
P3X13: J1X13.3 Q2X13.1
P3X21: J1X21.3 Q2X21.1
P3X22: J1X22.3 Q2X22.1
P3X23: J1X23.3 Q2X23.1
P4X11: J1X11.4 Q3X11.1
P4X12: J1X12.4 Q3X12.1
P4X13: J1X13.4 Q3X13.1
P4X21: J1X21.4 Q3X21.1
P4X22: J1X22.4 Q3X22.1
P4X23: J1X23.4 Q3X23.1
P5X11: J1X11.5 Q4X11.1
P5X12: J1X12.5 Q4X12.1
P5X13: J1X13.5 Q4X13.1
P5X21: J1X21.5 Q4X21.1
P5X22: J1X22.5 Q4X22.1
P5X23: J1X23.5 Q4X23.1
P6X11: J1X11.6 Q5X11.1
P6X12: J1X12.6 Q5X12.1
P6X13: J1X13.6 Q5X13.1
P6X21: J1X21.6 Q5X21.1
P6X22: J1X22.6 Q5X22.1
P6X23: J1X23.6 Q5X23.1
P7X11: J1X11.7 Q6X11.1
P7X12: J1X12.7 Q6X12.1
P7X13: J1X13.7 Q6X13.1
P7X21: J1X21.7 Q6X21.1
P7X22: J1X22.7 Q6X22.1
P7X23: J1X23.7 Q6X23.1
P8X11: J1X11.8 Q7X11.1
P8X12: J1X12.8 Q7X12.1
P8X13: J1X13.8 Q7X13.1
P8X21: J1X21.8 Q7X21.1
P8X22: J1X22.8 Q7X22.1
P8X23: J1X23.8 Q7X23.1
P9X11: J2X11.1 Q8X11.1
P9X12: J2X12.1 Q8X12.1
P9X13: J2X13.1 Q8X13.1
P9X21: J2X21.1 Q8X21.1
P9X22: J2X22.1 Q8X22.1
P9X23: J2X23.1 Q8X23.1
P10X11: J2X11.2 Q9X11.1
P10X12: J2X12.2 Q9X12.1
P10X13: J2X13.2 Q9X13.1
P10X21: J2X21.2 Q9X21.1
P10X22: J2X22.2 Q9X22.1
P10X23: J2X23.2 Q9X23.1
P11X11: J2X11.3 Q10X11.1
P11X12: J2X12.3 Q10X12.1
P11X13: J2X13.3 Q10X13.1
P11X21: J2X21.3 Q10X21.1
P11X22: J2X22.3 Q10X22.1
P11X23: J2X23.3 Q10X23.1
P12X11: J2X11.4 Q11X11.1
P12X12: J2X12.4 Q11X12.1
P12X13: J2X13.4 Q11X13.1
P12X21: J2X21.4 Q11X21.1
P12X22: J2X22.4 Q11X22.1
P12X23: J2X23.4 Q11X23.1
P13X11: J2X11.5 Q12X11.1
P13X12: J2X12.5 Q12X12.1
P13X13: J2X13.5 Q12X13.1
P13X21: J2X21.5 Q12X21.1
P13X22: J2X22.5 Q12X22.1
P13X23: J2X23.5 Q12X23.1
P14X11: J2X11.6 Q13X11.1
P14X12: J2X12.6 Q13X12.1
P14X13: J2X13.6 Q13X13.1
P14X21: J2X21.6 Q13X21.1
P14X22: J2X22.6 Q13X22.1
P14X23: J2X23.6 Q13X23.1
P15X11: J2X11.7 Q14X11.1
P15X12: J2X12.7 Q14X12.1
P15X13: J2X13.7 Q14X13.1
P15X21: J2X21.7 Q14X21.1
P15X22: J2X22.7 Q14X22.1
P15X23: J2X23.7 Q14X23.1
P16X11: J2X11.8 Q15X11.1
P16X12: J2X12.8 Q15X12.1
P16X13: J2X13.8 Q15X13.1
P16X21: J2X21.8 Q15X21.1
P16X22: J2X22.8 Q15X22.1
P16X23: J2X23.8 Q15X23.1
VCCX11: CON1X11.2 CON2X11.2 Q0X11.2 Q1X11.2 Q2X11.2 Q3X11.2 Q4X11.2 Q5X11.2 Q6X11.2 Q7X11.2 Q8X11.2 Q9X11.2 Q10X11.2 Q11X11.2 Q12X11.2 Q13X11.2 Q14X11.2 Q15X11.2
VCCX12: CON1X12.2 CON2X12.2 Q0X12.2 Q1X12.2 Q2X12.2 Q3X12.2 Q4X12.2 Q5X12.2 Q6X12.2 Q7X12.2 Q8X12.2 Q9X12.2 Q10X12.2 Q11X12.2 Q12X12.2 Q13X12.2 Q14X12.2 Q15X12.2
VCCX13: CON1X13.2 CON2X13.2 Q0X13.2 Q1X13.2 Q2X13.2 Q3X13.2 Q4X13.2 Q5X13.2 Q6X13.2 Q7X13.2 Q8X13.2 Q9X13.2 Q10X13.2 Q11X13.2 Q12X13.2 Q13X13.2 Q14X13.2 Q15X13.2
VCCX21: CON1X21.2 CON2X21.2 Q0X21.2 Q1X21.2 Q2X21.2 Q3X21.2 Q4X21.2 Q5X21.2 Q6X21.2 Q7X21.2 Q8X21.2 Q9X21.2 Q10X21.2 Q11X21.2 Q12X21.2 Q13X21.2 Q14X21.2 Q15X21.2
VCCX22: CON1X22.2 CON2X22.2 Q0X22.2 Q1X22.2 Q2X22.2 Q3X22.2 Q4X22.2 Q5X22.2 Q6X22.2 Q7X22.2 Q8X22.2 Q9X22.2 Q10X22.2 Q11X22.2 Q12X22.2 Q13X22.2 Q14X22.2 Q15X22.2
VCCX23: CON1X23.2 CON2X23.2 Q0X23.2 Q1X23.2 Q2X23.2 Q3X23.2 Q4X23.2 Q5X23.2 Q6X23.2 Q7X23.2 Q8X23.2 Q9X23.2 Q10X23.2 Q11X23.2 Q12X23.2 Q13X23.2 Q14X23.2 Q15X23.2

## Tracks (layer width: path | path; a pad name or v marks a point on that pad's centre or on a via)
GNDX11  (14 unrouted)
  Top 0.61: LED1X11.C LED15X11.C 3.54,9.47 2.87,9.47 1.91,10.44 1.91,17.3 CON2X11.1 CON1X11.1
GNDX12  (14 unrouted)
  Top 0.61: LED1X12.C LED15X12.C 3.54,37.41 2.87,37.41 1.91,38.38 1.91,45.24 CON2X12.1 CON1X12.1
GNDX13  (14 unrouted)
  Top 0.61: LED1X13.C LED15X13.C 3.54,65.35 2.87,65.35 1.91,66.32 1.91,73.18 CON2X13.1 CON1X13.1
GNDX21  (14 unrouted)
  Top 0.61: LED1X21.C LED15X21.C 47.99,9.47 47.32,9.47 46.35,10.44 46.35,17.3 CON2X21.1 CON1X21.1
GNDX22  (14 unrouted)
  Top 0.61: LED1X22.C LED15X22.C 47.99,37.41 47.32,37.41 46.35,38.38 46.35,45.24 CON2X22.1 CON1X22.1
GNDX23  (14 unrouted)
  Top 0.61: LED1X23.C LED15X23.C 47.99,65.35 47.32,65.35 46.35,66.32 46.35,73.18 CON2X23.1 CON1X23.1
N$1X11
  Top 0.254: Q4X11.3 31.47,14.92 R11X11.2
N$1X12
  Top 0.254: Q4X12.3 31.47,42.86 R11X12.2
N$1X13
  Top 0.254: Q4X13.3 31.47,70.8 R11X13.2
N$1X21
  Top 0.254: Q4X21.3 75.92,14.92 R11X21.2
N$1X22
  Top 0.254: Q4X22.3 75.92,42.86 R11X22.2
N$1X23
  Top 0.254: Q4X23.3 75.92,70.8 R11X23.2
N$3X11
  Top 0.254: Q5X11.3 28.93,14.92 R8X11.2
N$3X12
  Top 0.254: Q5X12.3 28.93,42.86 R8X12.2
N$3X13
  Top 0.254: Q5X13.3 28.93,70.8 R8X13.2
N$3X21
  Top 0.254: Q5X21.3 73.38,14.92 R8X21.2
N$3X22
  Top 0.254: Q5X22.3 73.38,42.86 R8X22.2
N$3X23
  Top 0.254: Q5X23.3 73.38,70.8 R8X23.2
N$4X11
  Top 0.254: Q6X11.3 26.39,14.92 R9X11.2
N$4X12
  Top 0.254: Q6X12.3 26.39,42.86 R9X12.2
N$4X13
  Top 0.254: Q6X13.3 26.39,70.8 R9X13.2
N$4X21
  Top 0.254: Q6X21.3 70.84,14.92 R9X21.2
N$4X22
  Top 0.254: Q6X22.3 70.84,42.86 R9X22.2
N$4X23
  Top 0.254: Q6X23.3 70.84,70.8 R9X23.2
N$5X11
  Top 0.254: Q7X11.3 23.85,14.92 R10X11.2
N$5X12
  Top 0.254: Q7X12.3 23.85,42.86 R10X12.2
N$5X13
  Top 0.254: Q7X13.3 23.85,70.8 R10X13.2
N$5X21
  Top 0.254: Q7X21.3 68.3,14.92 R10X21.2
N$5X22
  Top 0.254: Q7X22.3 68.3,42.86 R10X22.2
N$5X23
  Top 0.254: Q7X23.3 68.3,70.8 R10X23.2
N$6X11
  Top 0.254: R11X11.1 LED8X11.A
N$6X12
  Top 0.254: R11X12.1 LED8X12.A
N$6X13
  Top 0.254: R11X13.1 LED8X13.A
N$6X21
  Top 0.254: R11X21.1 LED8X21.A
N$6X22
  Top 0.254: R11X22.1 LED8X22.A
N$6X23
  Top 0.254: R11X23.1 LED8X23.A
N$7X11
  Top 0.254: R8X11.1 LED5X11.A
N$7X12
  Top 0.254: R8X12.1 LED5X12.A
N$7X13
  Top 0.254: R8X13.1 LED5X13.A
N$7X21
  Top 0.254: R8X21.1 LED5X21.A
N$7X22
  Top 0.254: R8X22.1 LED5X22.A
N$7X23
  Top 0.254: R8X23.1 LED5X23.A
N$8X11
  Top 0.254: R9X11.1 LED6X11.A
N$8X12
  Top 0.254: R9X12.1 LED6X12.A
N$8X13
  Top 0.254: R9X13.1 LED6X13.A
N$8X21
  Top 0.254: R9X21.1 LED6X21.A
N$8X22
  Top 0.254: R9X22.1 LED6X22.A
N$8X23
  Top 0.254: R9X23.1 LED6X23.A
N$9X11
  Top 0.254: R10X11.1 LED7X11.A
N$9X12
  Top 0.254: R10X12.1 LED7X12.A
N$9X13
  Top 0.254: R10X13.1 LED7X13.A
N$9X21
  Top 0.254: R10X21.1 LED7X21.A
N$9X22
  Top 0.254: R10X22.1 LED7X22.A
N$9X23
  Top 0.254: R10X23.1 LED7X23.A
N$10X11
  Top 0.254: Q8X11.3 21.31,14.92 R15X11.2
N$10X12
  Top 0.254: Q8X12.3 21.31,42.86 R15X12.2
N$10X13
  Top 0.254: Q8X13.3 21.31,70.8 R15X13.2
N$10X21
  Top 0.254: Q8X21.3 65.76,14.92 R15X21.2
N$10X22
  Top 0.254: Q8X22.3 65.76,42.86 R15X22.2
N$10X23
  Top 0.254: Q8X23.3 65.76,70.8 R15X23.2
N$11X11
  Top 0.254: Q9X11.3 18.77,14.92 R12X11.2
N$11X12
  Top 0.254: Q9X12.3 18.77,42.86 R12X12.2
N$11X13
  Top 0.254: Q9X13.3 18.77,70.8 R12X13.2
N$11X21
  Top 0.254: Q9X21.3 63.22,14.92 R12X21.2
N$11X22
  Top 0.254: Q9X22.3 63.22,42.86 R12X22.2
N$11X23
  Top 0.254: Q9X23.3 63.22,70.8 R12X23.2
N$12X11
  Top 0.254: Q10X11.3 16.23,14.92 R13X11.2
N$12X12
  Top 0.254: Q10X12.3 16.23,42.86 R13X12.2
N$12X13
  Top 0.254: Q10X13.3 16.23,70.8 R13X13.2
N$12X21
  Top 0.254: Q10X21.3 60.68,14.92 R13X21.2
N$12X22
  Top 0.254: Q10X22.3 60.68,42.86 R13X22.2
N$12X23
  Top 0.254: Q10X23.3 60.68,70.8 R13X23.2
N$13X11
  Top 0.254: Q11X11.3 13.69,14.92 R14X11.2
N$13X12
  Top 0.254: Q11X12.3 13.69,42.86 R14X12.2
N$13X13
  Top 0.254: Q11X13.3 13.69,70.8 R14X13.2
N$13X21
  Top 0.254: Q11X21.3 58.14,14.92 R14X21.2
N$13X22
  Top 0.254: Q11X22.3 58.14,42.86 R14X22.2
N$13X23
  Top 0.254: Q11X23.3 58.14,70.8 R14X23.2
N$14X11
  Top 0.254: R15X11.1 LED12X11.A
N$14X12
  Top 0.254: R15X12.1 LED12X12.A
N$14X13
  Top 0.254: R15X13.1 LED12X13.A
N$14X21
  Top 0.254: R15X21.1 LED12X21.A
N$14X22
  Top 0.254: R15X22.1 LED12X22.A
N$14X23
  Top 0.254: R15X23.1 LED12X23.A
N$15X11
  Top 0.254: R12X11.1 LED9X11.A
N$15X12
  Top 0.254: R12X12.1 LED9X12.A
N$15X13
  Top 0.254: R12X13.1 LED9X13.A
N$15X21
  Top 0.254: R12X21.1 LED9X21.A
N$15X22
  Top 0.254: R12X22.1 LED9X22.A
N$15X23
  Top 0.254: R12X23.1 LED9X23.A
N$23X11
  Top 0.254: R13X11.1 LED10X11.A
N$23X12
  Top 0.254: R13X12.1 LED10X12.A
N$23X13
  Top 0.254: R13X13.1 LED10X13.A
N$23X21
  Top 0.254: R13X21.1 LED10X21.A
N$23X22
  Top 0.254: R13X22.1 LED10X22.A
N$23X23
  Top 0.254: R13X23.1 LED10X23.A
N$24X11
  Top 0.254: R14X11.1 LED11X11.A
N$24X12
  Top 0.254: R14X12.1 LED11X12.A
N$24X13
  Top 0.254: R14X13.1 LED11X13.A
N$24X21
  Top 0.254: R14X21.1 LED11X21.A
N$24X22
  Top 0.254: R14X22.1 LED11X22.A
N$24X23
  Top 0.254: R14X23.1 LED11X23.A
N$28X11
  Top 0.254: Q12X11.3 11.15,14.92 R22X11.2
N$28X12
  Top 0.254: Q12X12.3 11.15,42.86 R22X12.2
N$28X13
  Top 0.254: Q12X13.3 11.15,70.8 R22X13.2
N$28X21
  Top 0.254: Q12X21.3 55.6,14.92 R22X21.2
N$28X22
  Top 0.254: Q12X22.3 55.6,42.86 R22X22.2
N$28X23
  Top 0.254: Q12X23.3 55.6,70.8 R22X23.2
N$29X11
  Top 0.254: Q13X11.3 8.61,14.92 R16X11.2
N$29X12
  Top 0.254: Q13X12.3 8.61,42.86 R16X12.2
N$29X13
  Top 0.254: Q13X13.3 8.61,70.8 R16X13.2
N$29X21
  Top 0.254: Q13X21.3 53.06,14.92 R16X21.2
N$29X22
  Top 0.254: Q13X22.3 53.06,42.86 R16X22.2
N$29X23
  Top 0.254: Q13X23.3 53.06,70.8 R16X23.2
N$30X11
  Top 0.254: 6.07,14.92 R17X11.2 6.86,14.94 7.06,15.11 7.06,22.89 6.1,23.85 Q14X11.3
N$30X12
  Top 0.254: 6.07,42.86 R17X12.2 6.86,42.88 7.06,43.05 7.06,50.83 6.1,51.79 Q14X12.3
N$30X13
  Top 0.254: 6.07,70.8 R17X13.2 6.86,70.81 7.06,70.99 7.06,78.77 6.1,79.73 Q14X13.3
N$30X21
  Top 0.254: 50.52,14.92 R17X21.2 51.31,14.94 51.51,15.11 51.51,22.89 50.55,23.85 Q14X21.3
N$30X22
  Top 0.254: 50.52,42.86 R17X22.2 51.31,42.88 51.51,43.05 51.51,50.83 50.55,51.79 Q14X22.3
N$30X23
  Top 0.254: 50.52,70.8 R17X23.2 51.31,70.81 51.51,70.99 51.51,78.77 50.55,79.73 Q14X23.3
N$31X11
  Top 0.254: 3.53,14.92 R21X11.2 3.58,14.95 3.58,15.24 4.14,15.8 5.61,15.8 6.48,16.66 6.48,22.02 6.03,22.47 Q15X11.3
N$31X12
  Top 0.254: 3.53,42.86 R21X12.2 3.58,42.89 3.58,43.18 4.14,43.74 5.61,43.74 6.48,44.6 6.48,49.96 6.03,50.41 Q15X12.3
N$31X13
  Top 0.254: 3.53,70.8 R21X13.2 3.58,70.83 3.58,71.12 4.14,71.68 5.61,71.68 6.48,72.54 6.48,77.9 6.03,78.35 Q15X13.3
N$31X21
  Top 0.254: 47.98,14.92 R21X21.2 48.03,14.95 48.03,15.24 48.59,15.8 50.06,15.8 50.93,16.66 50.93,22.02 50.48,22.47 Q15X21.3
N$31X22
  Top 0.254: 47.98,42.86 R21X22.2 48.03,42.89 48.03,43.18 48.59,43.74 50.06,43.74 50.93,44.6 50.93,49.96 50.48,50.41 Q15X22.3
N$31X23
  Top 0.254: 47.98,70.8 R21X23.2 48.03,70.83 48.03,71.12 48.59,71.68 50.06,71.68 50.93,72.54 50.93,77.9 50.48,78.35 Q15X23.3
N$32X11
  Top 0.254: R22X11.1 LED16X11.A
N$32X12
  Top 0.254: R22X12.1 LED16X12.A
N$32X13
  Top 0.254: R22X13.1 LED16X13.A
N$32X21
  Top 0.254: R22X21.1 LED16X21.A
N$32X22
  Top 0.254: R22X22.1 LED16X22.A
N$32X23
  Top 0.254: R22X23.1 LED16X23.A
N$33X11
  Top 0.254: R16X11.1 LED13X11.A
N$33X12
  Top 0.254: R16X12.1 LED13X12.A
N$33X13
  Top 0.254: R16X13.1 LED13X13.A
N$33X21
  Top 0.254: R16X21.1 LED13X21.A
N$33X22
  Top 0.254: R16X22.1 LED13X22.A
N$33X23
  Top 0.254: R16X23.1 LED13X23.A
N$34X11
  Top 0.254: R17X11.1 LED14X11.A
N$34X12
  Top 0.254: R17X12.1 LED14X12.A
N$34X13
  Top 0.254: R17X13.1 LED14X13.A
N$34X21
  Top 0.254: R17X21.1 LED14X21.A
N$34X22
  Top 0.254: R17X22.1 LED14X22.A
N$34X23
  Top 0.254: R17X23.1 LED14X23.A
N$35X11
  Top 0.254: R21X11.1 LED15X11.A
N$35X12
  Top 0.254: R21X12.1 LED15X12.A
N$35X13
  Top 0.254: R21X13.1 LED15X13.A
N$35X21
  Top 0.254: R21X21.1 LED15X21.A
N$35X22
  Top 0.254: R21X22.1 LED15X22.A
N$35X23
  Top 0.254: R21X23.1 LED15X23.A
N$44X11
  Top 0.254: Q0X11.3 41.68,14.92 R7X11.2
N$44X12
  Top 0.254: Q0X12.3 41.68,42.86 R7X12.2
N$44X13
  Top 0.254: Q0X13.3 41.68,70.8 R7X13.2
N$44X21
  Top 0.254: Q0X21.3 86.13,14.92 R7X21.2
N$44X22
  Top 0.254: Q0X22.3 86.13,42.86 R7X22.2
N$44X23
  Top 0.254: Q0X23.3 86.13,70.8 R7X23.2
N$45X11
  Top 0.254: Q1X11.3 39.09,14.92 R4X11.2
N$45X12
  Top 0.254: Q1X12.3 39.09,42.86 R4X12.2
N$45X13
  Top 0.254: Q1X13.3 39.09,70.8 R4X13.2
N$45X21
  Top 0.254: Q1X21.3 83.54,14.92 R4X21.2
N$45X22
  Top 0.254: Q1X22.3 83.54,42.86 R4X22.2
N$45X23
  Top 0.254: Q1X23.3 83.54,70.8 R4X23.2
N$46X11
  Top 0.254: Q2X11.3 36.55,14.92 R5X11.2
N$46X12
  Top 0.254: Q2X12.3 36.55,42.86 R5X12.2
N$46X13
  Top 0.254: Q2X13.3 36.55,70.8 R5X13.2
N$46X21
  Top 0.254: Q2X21.3 81,14.92 R5X21.2
N$46X22
  Top 0.254: Q2X22.3 81,42.86 R5X22.2
N$46X23
  Top 0.254: Q2X23.3 81,70.8 R5X23.2
N$47X11
  Top 0.254: Q3X11.3 34.01,14.92 R6X11.2
N$47X12
  Top 0.254: Q3X12.3 34.01,42.86 R6X12.2
N$47X13
  Top 0.254: Q3X13.3 34.01,70.8 R6X13.2
N$47X21
  Top 0.254: Q3X21.3 78.46,14.92 R6X21.2
N$47X22
  Top 0.254: Q3X22.3 78.46,42.86 R6X22.2
N$47X23
  Top 0.254: Q3X23.3 78.46,70.8 R6X23.2
N$48X11
  Top 0.254: R7X11.1 41.66,11.85 LED1X11.A
N$48X12
  Top 0.254: R7X12.1 41.66,39.79 LED1X12.A
N$48X13
  Top 0.254: R7X13.1 41.66,67.73 LED1X13.A
N$48X21
  Top 0.254: R7X21.1 86.11,11.85 LED1X21.A
N$48X22
  Top 0.254: R7X22.1 86.11,39.79 LED1X22.A
N$48X23
  Top 0.254: R7X23.1 86.11,67.73 LED1X23.A
N$49X11
  Top 0.254: R4X11.1 39.12,11.85 LED2X11.A
N$49X12
  Top 0.254: R4X12.1 39.12,39.79 LED2X12.A
N$49X13
  Top 0.254: R4X13.1 39.12,67.73 LED2X13.A
N$49X21
  Top 0.254: R4X21.1 83.57,11.85 LED2X21.A
N$49X22
  Top 0.254: R4X22.1 83.57,39.79 LED2X22.A
N$49X23
  Top 0.254: R4X23.1 83.57,67.73 LED2X23.A
N$50X11
  Top 0.254: R5X11.1 LED3X11.A
N$50X12
  Top 0.254: R5X12.1 LED3X12.A
N$50X13
  Top 0.254: R5X13.1 LED3X13.A
N$50X21
  Top 0.254: R5X21.1 LED3X21.A
N$50X22
  Top 0.254: R5X22.1 LED3X22.A
N$50X23
  Top 0.254: R5X23.1 LED3X23.A
N$51X11
  Top 0.254: R6X11.1 LED4X11.A
N$51X12
  Top 0.254: R6X12.1 LED4X12.A
N$51X13
  Top 0.254: R6X13.1 LED4X13.A
N$51X21
  Top 0.254: R6X21.1 LED4X21.A
N$51X22
  Top 0.254: R6X22.1 LED4X22.A
N$51X23
  Top 0.254: R6X23.1 LED4X23.A
P1X11
  Top 0.254: J1X11.1 42.57,29.19 Q0X11.1
P1X12
  Top 0.254: J1X12.1 42.57,57.13 Q0X12.1
P1X13
  Top 0.254: J1X13.1 42.57,85.07 Q0X13.1
P1X21
  Top 0.254: J1X21.1 87.02,29.19 Q0X21.1
P1X22
  Top 0.254: J1X22.1 87.02,57.13 Q0X22.1
P1X23
  Top 0.254: J1X23.1 87.02,85.07 Q0X23.1
P2X11
  Top 0.254: Q1X11.1 40.07,26.08 39.4,26.75 39.4,31.83 40.03,32.46 J1X11.2
P2X12
  Top 0.254: Q1X12.1 40.07,54.02 39.4,54.69 39.4,59.77 40.03,60.4 J1X12.2
P2X13
  Top 0.254: Q1X13.1 40.07,81.96 39.4,82.63 39.4,87.71 40.03,88.34 J1X13.2
P2X21
  Top 0.254: Q1X21.1 84.52,26.08 83.84,26.75 83.84,31.83 84.48,32.46 J1X21.2
P2X22
  Top 0.254: Q1X22.1 84.52,54.02 83.84,54.69 83.84,59.77 84.48,60.4 J1X22.2
P2X23
  Top 0.254: Q1X23.1 84.52,81.96 83.84,82.63 83.84,87.71 84.48,88.34 J1X23.2
P3X11
  Top 0.254: J1X11.3 37.49,29.19 Q2X11.1
P3X12
  Top 0.254: J1X12.3 37.49,57.13 Q2X12.1
P3X13
  Top 0.254: J1X13.3 37.49,85.07 Q2X13.1
P3X21
  Top 0.254: J1X21.3 81.94,29.19 Q2X21.1
P3X22
  Top 0.254: J1X22.3 81.94,57.13 Q2X22.1
P3X23
  Top 0.254: J1X23.3 81.94,85.07 Q2X23.1
P4X11
  Top 0.254: Q3X11.1 34.99,26.08 34.31,26.75 34.31,31.83 34.95,32.46 J1X11.4
P4X12
  Top 0.254: Q3X12.1 34.99,54.02 34.31,54.69 34.31,59.77 34.95,60.4 J1X12.4
P4X13
  Top 0.254: Q3X13.1 34.99,81.96 34.31,82.63 34.31,87.71 34.95,88.34 J1X13.4
P4X21
  Top 0.254: Q3X21.1 79.44,26.08 78.77,26.75 78.77,31.83 79.4,32.46 J1X21.4
P4X22
  Top 0.254: Q3X22.1 79.44,54.02 78.77,54.69 78.77,59.77 79.4,60.4 J1X22.4
P4X23
  Top 0.254: Q3X23.1 79.44,81.96 78.77,82.63 78.77,87.71 79.4,88.34 J1X23.4
P5X11
  Top 0.254: J1X11.5 32.41,29.19 Q4X11.1
P5X12
  Top 0.254: J1X12.5 32.41,57.13 Q4X12.1
P5X13
  Top 0.254: J1X13.5 32.41,85.07 Q4X13.1
P5X21
  Top 0.254: J1X21.5 76.86,29.19 Q4X21.1
P5X22
  Top 0.254: J1X22.5 76.86,57.13 Q4X22.1
P5X23
  Top 0.254: J1X23.5 76.86,85.07 Q4X23.1
P6X11
  Top 0.254: Q5X11.1 29.91,26.08 29.23,26.75 29.23,31.83 29.87,32.46 J1X11.6
P6X12
  Top 0.254: Q5X12.1 29.91,54.02 29.23,54.69 29.23,59.77 29.87,60.4 J1X12.6
P6X13
  Top 0.254: Q5X13.1 29.91,81.96 29.23,82.63 29.23,87.71 29.87,88.34 J1X13.6
P6X21
  Top 0.254: Q5X21.1 74.36,26.08 73.69,26.75 73.69,31.83 74.32,32.46 J1X21.6
P6X22
  Top 0.254: Q5X22.1 74.36,54.02 73.69,54.69 73.69,59.77 74.32,60.4 J1X22.6
P6X23
  Top 0.254: Q5X23.1 74.36,81.96 73.69,82.63 73.69,87.71 74.32,88.34 J1X23.6
P7X11
  Top 0.254: Q6X11.1 27.37,33.6 J1X11.7
P7X12
  Top 0.254: Q6X12.1 27.37,61.54 J1X12.7
P7X13
  Top 0.254: Q6X13.1 27.37,89.48 J1X13.7
P7X21
  Top 0.254: Q6X21.1 71.82,33.6 J1X21.7
P7X22
  Top 0.254: Q6X22.1 71.82,61.54 J1X22.7
P7X23
  Top 0.254: Q6X23.1 71.82,89.48 J1X23.7
P8X11
  Top 0.254: Q7X11.1 24.83,26.08 24.16,26.75 24.16,31.83 24.79,32.46 J1X11.8
P8X12
  Top 0.254: Q7X12.1 24.83,54.02 24.16,54.69 24.16,59.77 24.79,60.4 J1X12.8
P8X13
  Top 0.254: Q7X13.1 24.83,81.96 24.16,82.63 24.16,87.71 24.79,88.34 J1X13.8
P8X21
  Top 0.254: Q7X21.1 69.28,26.08 68.61,26.75 68.61,31.83 69.24,32.46 J1X21.8
P8X22
  Top 0.254: Q7X22.1 69.28,54.02 68.61,54.69 68.61,59.77 69.24,60.4 J1X22.8
P8X23
  Top 0.254: Q7X23.1 69.28,81.96 68.61,82.63 68.61,87.71 69.24,88.34 J1X23.8
P9X11
  Top 0.254: Q8X11.1 22.29,33.6 J2X11.1
P9X12
  Top 0.254: Q8X12.1 22.29,61.54 J2X12.1
P9X13
  Top 0.254: Q8X13.1 22.29,89.48 J2X13.1
P9X21
  Top 0.254: Q8X21.1 66.74,33.6 J2X21.1
P9X22
  Top 0.254: Q8X22.1 66.74,61.54 J2X22.1
P9X23
  Top 0.254: Q8X23.1 66.74,89.48 J2X23.1
P10X11
  Top 0.254: Q9X11.1 19.75,26.08 19.07,26.75 19.07,31.83 19.71,32.46 J2X11.2
P10X12
  Top 0.254: Q9X12.1 19.75,54.02 19.07,54.69 19.07,59.77 19.71,60.4 J2X12.2
P10X13
  Top 0.254: Q9X13.1 19.75,81.96 19.07,82.63 19.07,87.71 19.71,88.34 J2X13.2
P10X21
  Top 0.254: Q9X21.1 64.2,26.08 63.52,26.75 63.52,31.83 64.16,32.46 J2X21.2
P10X22
  Top 0.254: Q9X22.1 64.2,54.02 63.52,54.69 63.52,59.77 64.16,60.4 J2X22.2
P10X23
  Top 0.254: Q9X23.1 64.2,81.96 63.52,82.63 63.52,87.71 64.16,88.34 J2X23.2
P11X11
  Top 0.254: Q10X11.1 17.21,33.6 J2X11.3
P11X12
  Top 0.254: Q10X12.1 17.21,61.54 J2X12.3
P11X13
  Top 0.254: Q10X13.1 17.21,89.48 J2X13.3
P11X21
  Top 0.254: Q10X21.1 61.66,33.6 J2X21.3
P11X22
  Top 0.254: Q10X22.1 61.66,61.54 J2X22.3
P11X23
  Top 0.254: Q10X23.1 61.66,89.48 J2X23.3
P12X11
  Top 0.254: Q11X11.1 14.67,26.08 13.99,26.75 13.99,31.83 14.63,32.46 J2X11.4
P12X12
  Top 0.254: Q11X12.1 14.67,54.02 13.99,54.69 13.99,59.77 14.63,60.4 J2X12.4
P12X13
  Top 0.254: Q11X13.1 14.67,81.96 13.99,82.63 13.99,87.71 14.63,88.34 J2X13.4
P12X21
  Top 0.254: Q11X21.1 59.12,26.08 58.45,26.75 58.45,31.83 59.08,32.46 J2X21.4
P12X22
  Top 0.254: Q11X22.1 59.12,54.02 58.45,54.69 58.45,59.77 59.08,60.4 J2X22.4
P12X23
  Top 0.254: Q11X23.1 59.12,81.96 58.45,82.63 58.45,87.71 59.08,88.34 J2X23.4
P13X11
  Top 0.254: Q12X11.1 12.13,33.6 J2X11.5
P13X12
  Top 0.254: Q12X12.1 12.13,61.54 J2X12.5
P13X13
  Top 0.254: Q12X13.1 12.13,89.48 J2X13.5
P13X21
  Top 0.254: Q12X21.1 56.58,33.6 J2X21.5
P13X22
  Top 0.254: Q12X22.1 56.58,61.54 J2X22.5
P13X23
  Top 0.254: Q12X23.1 56.58,89.48 J2X23.5
P14X11
  Top 0.254: Q13X11.1 9.59,26.08 8.91,26.75 8.91,31.83 9.55,32.46 J2X11.6
P14X12
  Top 0.254: Q13X12.1 9.59,54.02 8.91,54.69 8.91,59.77 9.55,60.4 J2X12.6
P14X13
  Top 0.254: Q13X13.1 9.59,81.96 8.91,82.63 8.91,87.71 9.55,88.34 J2X13.6
P14X21
  Top 0.254: Q13X21.1 54.04,26.08 53.37,26.75 53.37,31.83 54,32.46 J2X21.6
P14X22
  Top 0.254: Q13X22.1 54.04,54.02 53.37,54.69 53.37,59.77 54,60.4 J2X22.6
P14X23
  Top 0.254: Q13X23.1 54.04,81.96 53.37,82.63 53.37,87.71 54,88.34 J2X23.6
P15X11
  Top 0.254: Q14X11.1 7.05,33.6 J2X11.7
P15X12
  Top 0.254: Q14X12.1 7.05,61.54 J2X12.7
P15X13
  Top 0.254: Q14X13.1 7.05,89.48 J2X13.7
P15X21
  Top 0.254: Q14X21.1 51.5,33.6 J2X21.7
P15X22
  Top 0.254: Q14X22.1 51.5,61.54 J2X22.7
P15X23
  Top 0.254: Q14X23.1 51.5,89.48 J2X23.7
P16X11
  Top 0.254: Q15X11.1 4.51,26.08 3.83,26.75 3.83,31.83 4.47,32.46 J2X11.8
P16X12
  Top 0.254: Q15X12.1 4.51,54.02 3.83,54.69 3.83,59.77 4.47,60.4 J2X12.8
P16X13
  Top 0.254: Q15X13.1 4.51,81.96 3.83,82.63 3.83,87.71 4.47,88.34 J2X13.8
P16X21
  Top 0.254: Q15X21.1 48.96,26.08 48.28,26.75 48.28,31.83 48.92,32.46 J2X21.8
P16X22
  Top 0.254: Q15X22.1 48.96,54.02 48.28,54.69 48.28,59.77 48.92,60.4 J2X22.8
P16X23
  Top 0.254: Q15X23.1 48.96,81.96 48.28,82.63 48.28,87.71 48.92,88.34 J2X23.8
VCCX11  (via drill 0.6 pad 0.9)  (1 unrouted)
  Top 0.254: 40.77,31.39 40.76,31.39 | Q0X11.2 40.64,29.19 v40.64,31.37 | Q2X11.2 35.74,29.19 v35.74,31.37 | Q4X11.2 30.71,29.19 v30.71,31.37 | Q6X11.2 25.6,29.19 v25.6,31.37 | Q8X11.2 20.73,29.19 v20.73,31.37 | Q10X11.2 15.72,29.19 v15.72,31.37 | Q12X11.2 10.08,29.19 v10.08,31.37 | Q14X11.2 5.05,29.19 v5.05,31.37 | Q15X11.2 2.59,24.67 v2.62,26.11 | Q1X11.2 v38.17,26.11 | Q13X11.2 7.69,26.11 v7.72,26.11 | Q11X11.2 12.77,26.11 v12.75,26.11 | Q9X11.2 17.85,26.11 v17.75,26.11 | Q7X11.2 22.93,26.11 v22.89,26.11 | Q5X11.2 28.01,26.11 v28.25,26.11 | Q3X11.2 33.09,26.11 v33.25,26.11
  Bottom 0.61: v40.64,31.37 v35.74,31.37 v30.71,31.37 v25.6,31.37 v20.73,31.37 v15.72,31.37 v10.08,31.37 v5.05,31.37 2.62,31.37 v2.62,26.11 5.08,26.11 | v38.17,26.11 v33.25,26.11 v28.25,26.11 v22.89,26.11 v17.75,26.11 v12.75,26.11 v7.72,26.11 5.08,26.11 | 5.08,26.11 5.16,25.78 CON1X11.2 CON2X11.2
VCCX12  (via drill 0.6 pad 0.9)  (1 unrouted)
  Top 0.254: 40.77,59.33 40.76,59.33 | Q0X12.2 40.64,57.13 v40.64,59.31 | Q2X12.2 35.74,57.13 v35.74,59.31 | Q4X12.2 30.71,57.13 v30.71,59.31 | Q6X12.2 25.6,57.13 v25.6,59.31 | Q8X12.2 20.73,57.13 v20.73,59.31 | Q10X12.2 15.72,57.13 v15.72,59.31 | Q12X12.2 10.08,57.13 v10.08,59.31 | Q14X12.2 5.05,57.13 v5.05,59.31 | Q15X12.2 2.59,52.61 v2.62,54.05 | Q1X12.2 v38.17,54.05 | Q13X12.2 7.69,54.05 v7.72,54.05 | Q11X12.2 12.77,54.05 v12.75,54.05 | Q9X12.2 17.85,54.05 v17.75,54.05 | Q7X12.2 22.93,54.05 v22.89,54.05 | Q5X12.2 28.01,54.05 v28.25,54.05 | Q3X12.2 33.09,54.05 v33.25,54.05
  Bottom 0.61: v40.64,59.31 v35.74,59.31 v30.71,59.31 v25.6,59.31 v20.73,59.31 v15.72,59.31 v10.08,59.31 v5.05,59.31 2.62,59.31 v2.62,54.05 5.08,54.05 | v38.17,54.05 v33.25,54.05 v28.25,54.05 v22.89,54.05 v17.75,54.05 v12.75,54.05 v7.72,54.05 5.08,54.05 | 5.08,54.05 5.16,53.72 CON1X12.2 CON2X12.2
VCCX13  (via drill 0.6 pad 0.9)  (1 unrouted)
  Top 0.254: 40.77,87.27 40.76,87.27 | Q0X13.2 40.64,85.07 v40.64,87.25 | Q2X13.2 35.74,85.07 v35.74,87.25 | Q4X13.2 30.71,85.07 v30.71,87.25 | Q6X13.2 25.6,85.07 v25.6,87.25 | Q8X13.2 20.73,85.07 v20.73,87.25 | Q10X13.2 15.72,85.07 v15.72,87.25 | Q12X13.2 10.08,85.07 v10.08,87.25 | Q14X13.2 5.05,85.07 v5.05,87.25 | Q15X13.2 2.59,80.55 v2.62,81.99 | Q1X13.2 v38.17,81.99 | Q13X13.2 7.69,81.99 v7.72,81.99 | Q11X13.2 12.77,81.99 v12.75,81.99 | Q9X13.2 17.85,81.99 v17.75,81.99 | Q7X13.2 22.93,81.99 v22.89,81.99 | Q5X13.2 28.01,81.99 v28.25,81.99 | Q3X13.2 33.09,81.99 v33.25,81.99
  Bottom 0.61: v40.64,87.25 v35.74,87.25 v30.71,87.25 v25.6,87.25 v20.73,87.25 v15.72,87.25 v10.08,87.25 v5.05,87.25 2.62,87.25 v2.62,81.99 5.08,81.99 | v38.17,81.99 v33.25,81.99 v28.25,81.99 v22.89,81.99 v17.75,81.99 v12.75,81.99 v7.72,81.99 5.08,81.99 | 5.08,81.99 5.16,81.66 CON1X13.2 CON2X13.2
VCCX21  (via drill 0.6 pad 0.9)  (1 unrouted)
  Top 0.254: 85.22,31.39 85.21,31.39 | Q0X21.2 85.09,29.19 v85.09,31.37 | Q2X21.2 80.19,29.19 v80.19,31.37 | Q4X21.2 75.16,29.19 v75.16,31.37 | Q6X21.2 70.05,29.19 v70.05,31.37 | Q8X21.2 65.18,29.19 v65.18,31.37 | Q10X21.2 60.17,29.19 v60.17,31.37 | Q12X21.2 54.53,29.19 v54.53,31.37 | Q14X21.2 49.51,29.19 v49.51,31.37 | Q15X21.2 v47.07,26.11 | Q1X21.2 v82.62,26.11 | Q13X21.2 52.14,26.11 v52.17,26.11 | Q11X21.2 57.22,26.11 v57.2,26.11 | Q9X21.2 62.3,26.11 v62.2,26.11 | Q7X21.2 67.38,26.11 v67.33,26.11 | Q5X21.2 72.46,26.11 v72.69,26.11 | Q3X21.2 77.54,26.11 v77.7,26.11
  Bottom 0.61: v85.09,31.37 v80.19,31.37 v75.16,31.37 v70.05,31.37 v65.18,31.37 v60.17,31.37 v54.53,31.37 v49.51,31.37 47.07,31.37 v47.07,26.11 49.53,26.11 | v82.62,26.11 v77.7,26.11 v72.69,26.11 v67.33,26.11 v62.2,26.11 v57.2,26.11 v52.17,26.11 49.53,26.11 | 49.53,26.11 49.61,25.78 CON1X21.2 CON2X21.2
VCCX22  (via drill 0.6 pad 0.9)  (1 unrouted)
  Top 0.254: 85.22,59.33 85.21,59.33 | Q0X22.2 85.09,57.13 v85.09,59.31 | Q2X22.2 80.19,57.13 v80.19,59.31 | Q4X22.2 75.16,57.13 v75.16,59.31 | Q6X22.2 70.05,57.13 v70.05,59.31 | Q8X22.2 65.18,57.13 v65.18,59.31 | Q10X22.2 60.17,57.13 v60.17,59.31 | Q12X22.2 54.53,57.13 v54.53,59.31 | Q14X22.2 49.51,57.13 v49.51,59.31 | Q15X22.2 v47.07,54.05 | Q1X22.2 v82.62,54.05 | Q13X22.2 52.14,54.05 v52.17,54.05 | Q11X22.2 57.22,54.05 v57.2,54.05 | Q9X22.2 62.3,54.05 v62.2,54.05 | Q7X22.2 67.38,54.05 v67.33,54.05 | Q5X22.2 72.46,54.05 v72.69,54.05 | Q3X22.2 77.54,54.05 v77.7,54.05
  Bottom 0.61: v85.09,59.31 v80.19,59.31 v75.16,59.31 v70.05,59.31 v65.18,59.31 v60.17,59.31 v54.53,59.31 v49.51,59.31 47.07,59.31 v47.07,54.05 49.53,54.05 | v82.62,54.05 v77.7,54.05 v72.69,54.05 v67.33,54.05 v62.2,54.05 v57.2,54.05 v52.17,54.05 49.53,54.05 | 49.53,54.05 49.61,53.72 CON1X22.2 CON2X22.2
VCCX23  (via drill 0.6 pad 0.9)  (1 unrouted)
  Top 0.254: 85.22,87.27 85.21,87.27 | Q0X23.2 85.09,85.07 v85.09,87.25 | Q2X23.2 80.19,85.07 v80.19,87.25 | Q4X23.2 75.16,85.07 v75.16,87.25 | Q6X23.2 70.05,85.07 v70.05,87.25 | Q8X23.2 65.18,85.07 v65.18,87.25 | Q10X23.2 60.17,85.07 v60.17,87.25 | Q12X23.2 54.53,85.07 v54.53,87.25 | Q14X23.2 49.51,85.07 v49.51,87.25 | Q15X23.2 v47.07,81.99 | Q1X23.2 v82.62,81.99 | Q13X23.2 52.14,81.99 v52.17,81.99 | Q11X23.2 57.22,81.99 v57.2,81.99 | Q9X23.2 62.3,81.99 v62.2,81.99 | Q7X23.2 67.38,81.99 v67.33,81.99 | Q5X23.2 72.46,81.99 v72.69,81.99 | Q3X23.2 77.54,81.99 v77.7,81.99
  Bottom 0.61: v85.09,87.25 v80.19,87.25 v75.16,87.25 v70.05,87.25 v65.18,87.25 v60.17,87.25 v54.53,87.25 v49.51,87.25 47.07,87.25 v47.07,81.99 49.53,81.99 | v82.62,81.99 v77.7,81.99 v72.69,81.99 v67.33,81.99 v62.2,81.99 v57.2,81.99 v52.17,81.99 49.53,81.99 | 49.53,81.99 49.61,81.66 CON1X23.2 CON2X23.2